# EAGLE board procesor-8A (EAGLE 7.2.0)
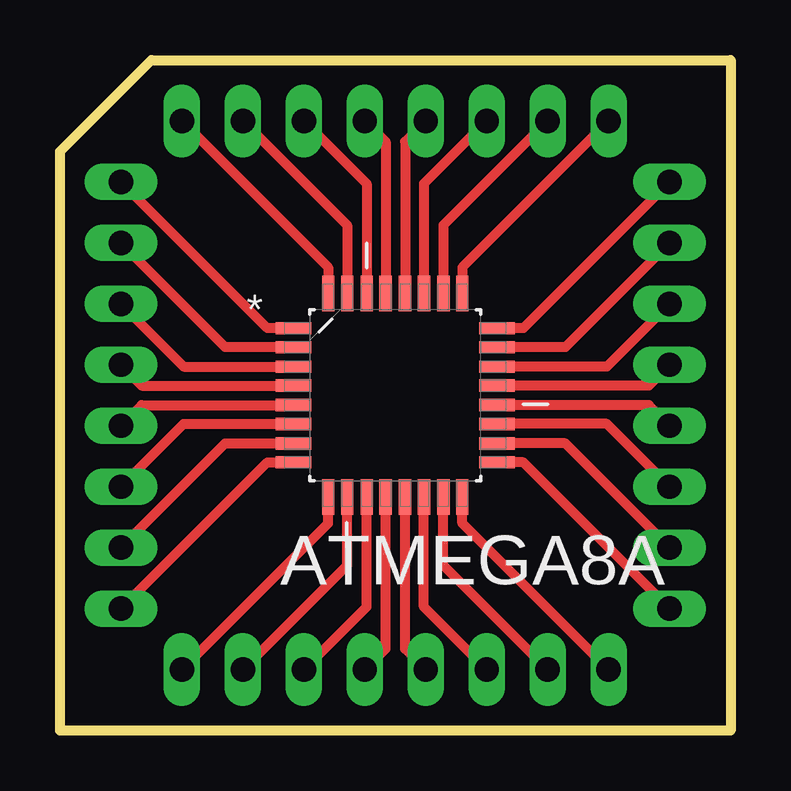
[diagram p0: board, top side]
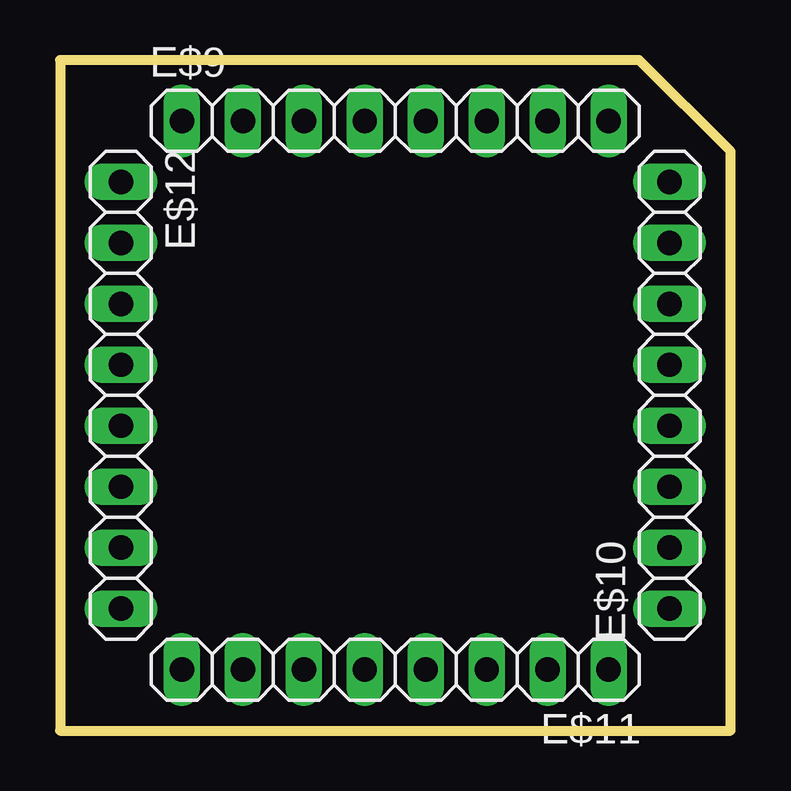
[diagram p1: board, bottom side, seen from below]

Size 27.94 x 27.94 mm. Coordinates in mm from the lower left corner, seen from the top.
Outline: 0,24.13 3.81,27.94 27.94,27.94 27.94,0 0,0 0,24.13
Copper layers (1*16): Top 0.035mm / dielectric 1.5mm / Bottom 0.035mm
Design rules "default": minimum track width 10mil, minimum drill 24mil, track to track 8mil, track to pad 8mil, pad to pad 8mil, via to via 8mil, smd to smd 8mil, copper to edge 40mil, drill to drill 8mil, minimum pad ring 10mil, minimum via ring 8mil, stop-mask expansion 4mil, vias tented up to drill 0mil, thermal gap 10mil

## Footprints (pad centres in the part's own frame; a part is rotated, then mirrored left to right if it is on the bottom)
QFP80P900X900X120-32N = smd 1.473 x 0.508: 1 -4.242,2.794; 2 -4.242,2.007; 3 -4.242,1.194; 4 -4.242,0.406; 5 -4.242,-0.406; 6 -4.242,-1.194; 7 -4.242,-2.007; 8 -4.242,-2.794; 17 4.242,-2.794; 18 4.242,-2.007; 19 4.242,-1.194; 20 4.242,-0.406; 21 4.242,0.406; 22 4.242,1.194; 23 4.242,2.007; 24 4.242,2.794 | smd 0.508 x 1.473: 9 -2.794,-4.242; 10 -2.007,-4.242; 11 -1.194,-4.242; 12 -0.406,-4.242; 13 0.406,-4.242; 14 1.194,-4.242; 15 2.007,-4.242; 16 2.794,-4.242; 25 2.794,4.242; 26 2.007,4.242; 27 1.194,4.242; 28 0.406,4.242; 29 -0.406,4.242; 30 -1.194,4.242; 31 -2.007,4.242; 32 -2.794,4.242
1X08 = drill 1.016 long: 1 -8.89,0; 2 -6.35,0; 3 -3.81,0; 4 -1.27,0; 5 1.27,0; 6 3.81,0; 7 6.35,0; 8 8.89,0

## Placement (x,y rotation side)
ATMEGA8A  [QFP80P900X900X120-32N]  13.97,13.97 0 top
E$9  [1X08]  13.97,25.4 0 bottom
E$10  [1X08]  2.54,13.97 90 bottom
E$11  [1X08]  13.97,2.54 180 bottom
E$12  [1X08]  25.4,13.97 270 bottom

## Library data of the parts
ATMEGA8A = atmega328smd
E$9-E$12 = pinhead

## Nets
S$1: ATMEGA8A.1 E$10.8
S$2: ATMEGA8A.2 E$10.7
S$3: ATMEGA8A.3 E$10.6
S$4: ATMEGA8A.4 E$10.5
S$5: ATMEGA8A.5 E$10.4
S$6: ATMEGA8A.6 E$10.3
S$7: ATMEGA8A.7 E$10.2
S$8: ATMEGA8A.8 E$10.1
S$9: ATMEGA8A.9 E$11.1
S$10: ATMEGA8A.10 E$11.2
S$11: ATMEGA8A.11 E$11.3
S$12: ATMEGA8A.12 E$11.4
S$13: ATMEGA8A.13 E$11.5
S$14: ATMEGA8A.14 E$11.6
S$15: ATMEGA8A.15 E$11.7
S$16: ATMEGA8A.16 E$11.8
S$17: ATMEGA8A.17 E$12.8
S$18: ATMEGA8A.18 E$12.7
S$19: ATMEGA8A.19 E$12.6
S$20: ATMEGA8A.20 E$12.5
S$21: ATMEGA8A.21 E$12.4
S$22: ATMEGA8A.22 E$12.3
S$23: ATMEGA8A.23 E$12.2
S$24: ATMEGA8A.24 E$12.1
S$25: ATMEGA8A.25 E$9.1
S$26: ATMEGA8A.26 E$9.2
S$27: ATMEGA8A.27 E$9.3
S$28: ATMEGA8A.28 E$9.4
S$29: ATMEGA8A.29 E$9.5
S$30: ATMEGA8A.30 E$9.6
S$31: ATMEGA8A.31 E$9.7
S$32: ATMEGA8A.32 E$9.8

## Tracks (layer width: path | path; a pad name or v marks a point on that pad's centre or on a via)
S$1
  Top 0.406: ATMEGA8A.1 8.64,16.76 E$10.8
S$2
  Top 0.406: ATMEGA8A.2 6.88,15.98 E$10.7
S$3
  Top 0.406: E$10.6 5.16,15.16 ATMEGA8A.3
S$4
  Top 0.406: E$10.5 3.4,14.38 ATMEGA8A.4
S$5
  Top 0.406: E$10.4 3.4,13.56 ATMEGA8A.5
S$6
  Top 0.406: E$10.3 5.16,12.78 ATMEGA8A.6
S$7
  Top 0.406: E$10.2 6.88,11.96 ATMEGA8A.7
S$8
  Top 0.406: E$10.1 8.64,11.18 ATMEGA8A.8
S$9
  Top 0.406: E$11.1 11.18,8.64 ATMEGA8A.9
S$10
  Top 0.406: E$11.2 11.96,6.88 ATMEGA8A.10
S$11
  Top 0.406: E$11.3 12.78,5.16 ATMEGA8A.11
S$12
  Top 0.406: E$11.4 13.56,3.4 ATMEGA8A.12
S$13
  Top 0.406: E$11.5 14.38,3.4 ATMEGA8A.13
S$14
  Top 0.406: E$11.6 15.16,5.16 ATMEGA8A.14
S$15
  Top 0.406: E$11.7 15.98,6.88 ATMEGA8A.15
S$16
  Top 0.406: E$11.8 16.76,8.64 ATMEGA8A.16
S$17
  Top 0.406: E$12.8 19.3,11.18 ATMEGA8A.17
S$18
  Top 0.406: E$12.7 21.06,11.96 ATMEGA8A.18
S$19
  Top 0.406: E$12.6 22.78,12.78 ATMEGA8A.19
S$20
  Top 0.406: E$12.5 24.54,13.56 ATMEGA8A.20
S$21
  Top 0.406: E$12.4 24.54,14.38 ATMEGA8A.21
S$22
  Top 0.406: E$12.3 22.78,15.16 ATMEGA8A.22
S$23
  Top 0.406: E$12.2 21.06,15.98 ATMEGA8A.23
S$24
  Top 0.406: E$12.1 19.3,16.76 ATMEGA8A.24
S$25
  Top 0.406: E$9.1 16.76,19.3 ATMEGA8A.25
S$26
  Top 0.406: E$9.2 15.98,21.06 ATMEGA8A.26
S$27
  Top 0.406: E$9.3 15.16,22.78 ATMEGA8A.27
S$28
  Top 0.406: E$9.4 14.38,24.54 ATMEGA8A.28
S$29
  Top 0.406: E$9.5 13.56,24.54 ATMEGA8A.29
S$30
  Top 0.406: E$9.6 12.78,22.78 ATMEGA8A.30
S$31
  Top 0.406: E$9.7 11.96,21.06 ATMEGA8A.31
S$32
  Top 0.406: E$9.8 11.18,19.3 ATMEGA8A.32